# Altium PCB Module_CYW20737A1KML2G.PcbDoc
Units mm, origin at the board's own origin, x right, y up, seen from the top; angles counter-clockwise.
Board outline 43 x 19 mm, 2 copper layers (Top Layer, Bottom Layer); 43 components, 28 nets, 137 pads, 114 vias.
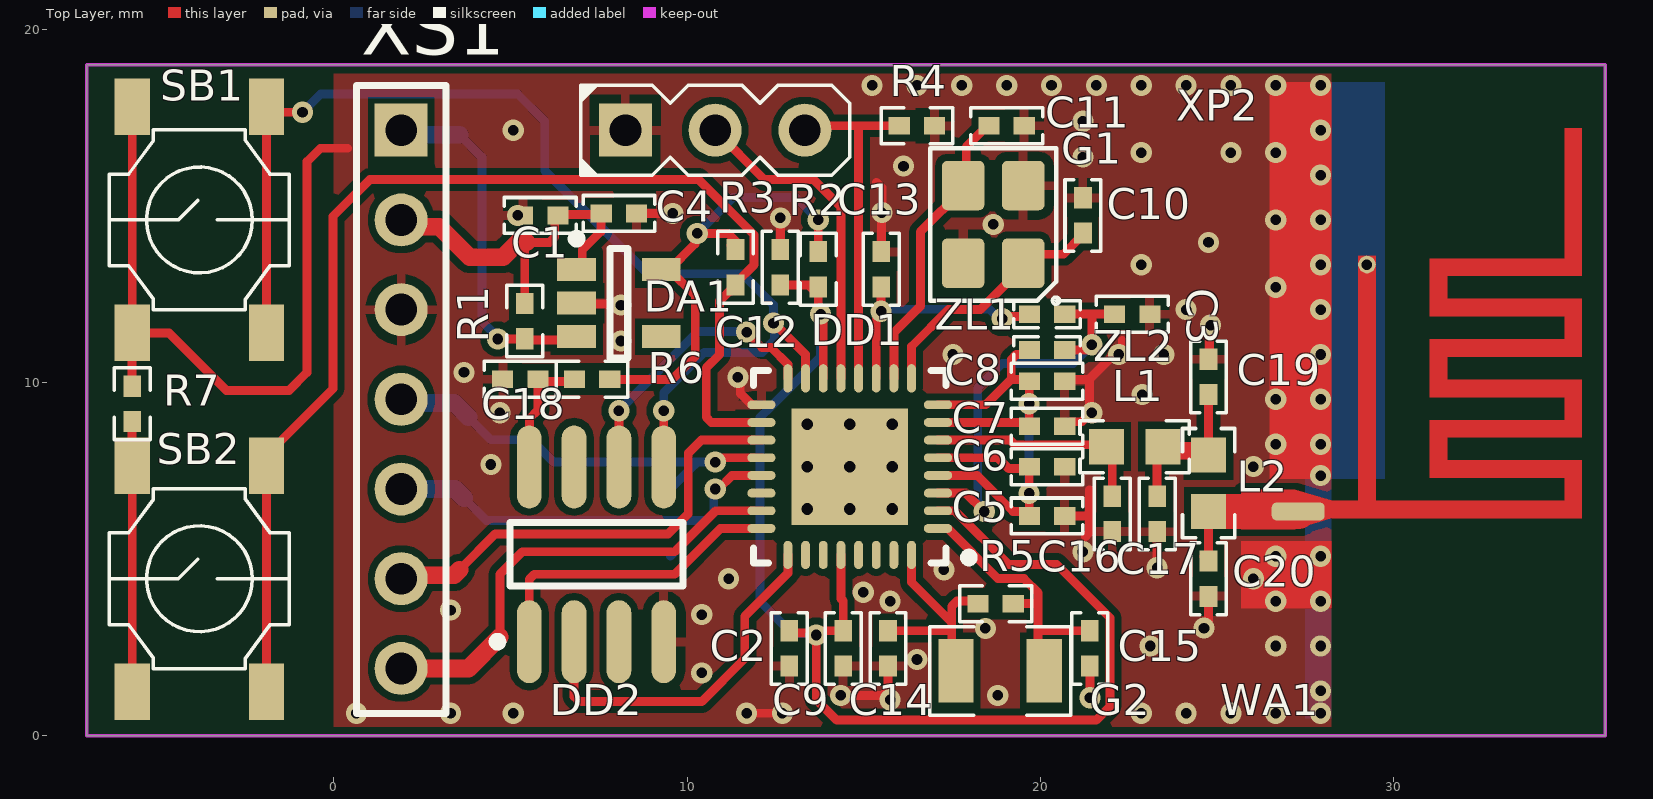
[diagram p0: Top Layer view]
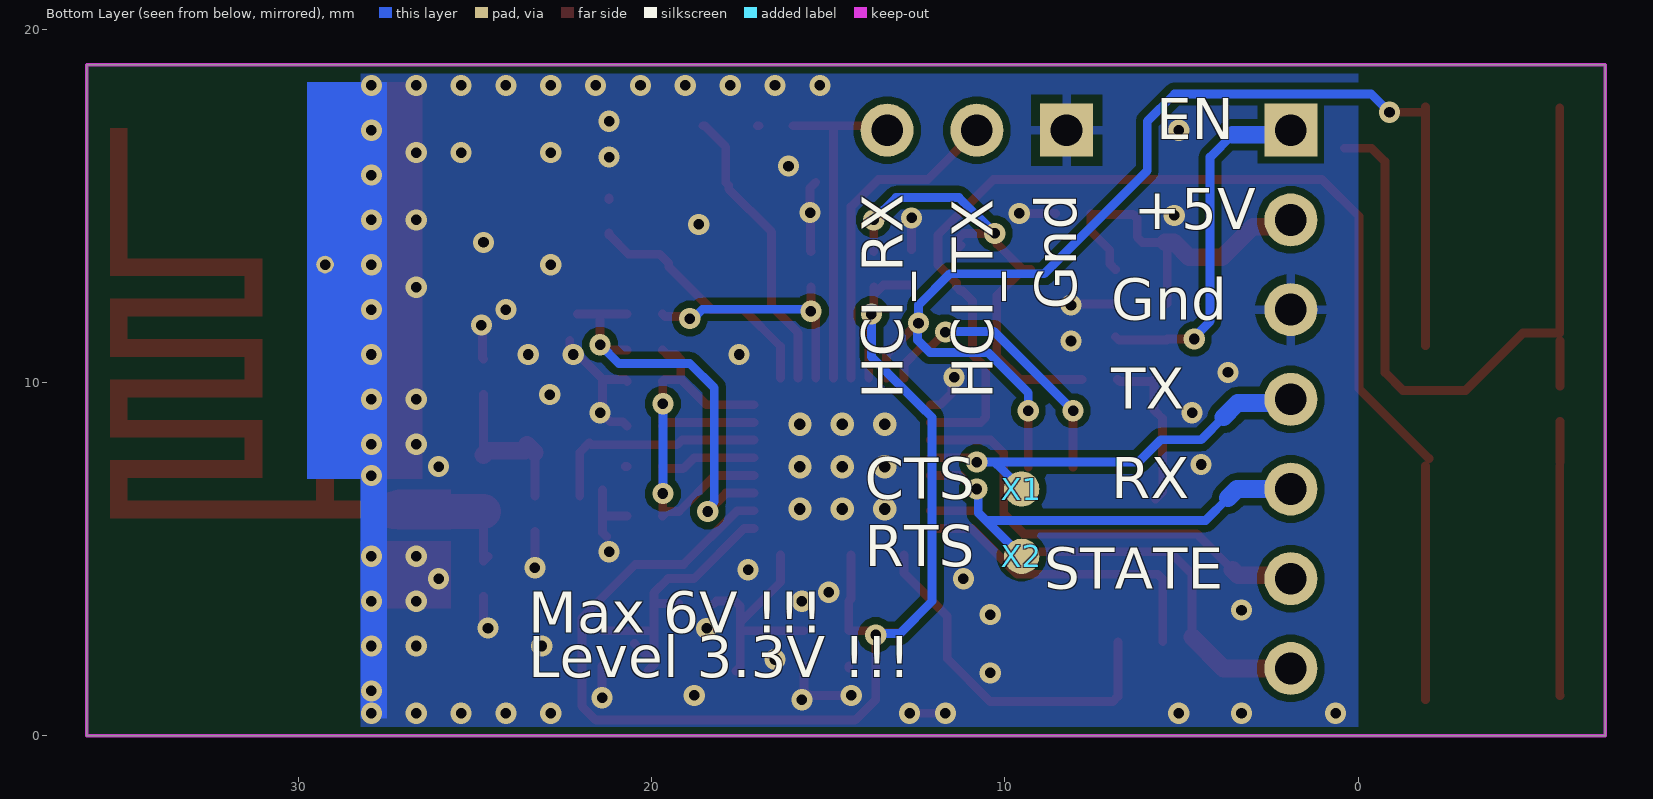
[diagram p1: Bottom Layer view, seen from below]

## Layer stack, top to bottom
Top Solder: solder mask 0.0102, Solder Resist, Dk 3.5
Top Layer: signal copper 0.0356
Dielectric 1: dielectric 0.32, FR-4, Dk 4.8
Bottom Layer: signal copper 0.0356
Bottom Solder: solder mask 0.0102, Solder Resist, Dk 3.5

## Board outline
-7,0 -7,19 36,19 36,0

## Design rules (kind name [scope] priority, off if disabled: settings)
Clearance InPolygon [All vs InPolygon] p1: gap=0.2 ignorepadtopadclearanceinfootprint=FALSE except(0: Arc-Hole Track-Hole SMDPad-Hole THPad-Hole Via-Hole Fill-Hole Poly-Hole Region-Hole Text-Hole)
Clearance [All] p2: gap=0.15 ignorepadtopadclearanceinfootprint=FALSE except(0: Arc-Hole Track-Hole SMDPad-Hole THPad-Hole Via-Hole Fill-Hole Poly-Hole Region-Hole Text-Hole)
PolygonConnect [All] p1: thpad.connectstyle=Relief thpad.reliefconductorwidth=0.254 thpad.reliefentries=4 thpad.polygonreliefangle="90 Angle" thpad.airgapwidth=0.254 smdpad.connectstyle=Relief smdpad.reliefconductorwidth=0.254 smdpad.reliefentries=4 smdpad.polygonreliefangle="90 Angle" smdpad.airgapwidth=0.254 via.connectstyle=Direct via.reliefconductorwidth=0.254 via.reliefentries=4 via.polygonreliefangle="90 Angle" via.airgapwidth=0.254
RoutingVias [All] p1: holewidth=0.5 width=0.9 viastyle="Through Hole" minholewidth=0.3 minwidth=0.6 maxholewidth=0.8 maxwidth=1.3
SolderMaskExpansion SolderMaskExpansion_IsVia [ISVia] p1: expansion=0.102 istentingtop=TRUE
SolderMaskExpansion [All] p2: expansion=0.102 istentingtop=FALSE
Width [All] p1: maxlimit=1 minlimit=0.25 preferedwidth=0.5
30 further rules are at their usual default settings.

## Components (designator, comment, footprint, x,y, rotation, side; value= is the part's Value field where it differs from the comment)
C1 "2.2u 10V" CapKemet1005(0402) 5.842,14.732 r0 top
C2 "2.2u 10V" CapKemet1005(0402) 12.896,2.47 r90 top
C3 "2.2u 10V" CapKemet1005(0402) 22.606,11.938 r180 top
C4 "100n 25V" CapKemet1005(0402) 8.07,14.789 r180 top
C5 "2.2u 10V" CapKemet1005(0402) 20.193,6.223 r180 top
C6 "10p 50V" CapKemet1005(0402) 20.193,7.62 r180 top
C7 "100n 25V" CapKemet1005(0402) 20.193,8.763 r180 top
C8 "10n 50V" CapKemet1005(0402) 20.193,10.033 r180 top
C9 "100n 25V" CapKemet1005(0402) 14.42,2.47 r90 top
C10 "20pF ±5% 50V" CapKemet1005(0402) 21.209,14.732 r270 top
C11 "20pF ±5% 50V" CapKemet1005(0402) 19.05,17.272 r180 top
C12 "100n 25V" CapKemet1005(0402) 12.642,13.265 r270 top
C13 "100n 25V" CapKemet1005(0402) 15.494,13.208 r270 top
C14 "10p" CapKemet1005(0402) 15.69,2.47 r90 top
C15 "10p" CapKemet1005(0402) 21.405,2.47 r90 top
C16 "DNP  NoBom" CapKemet1005(0402) 22.04,6.28 r90 top
C17 "DNP  NoBom" CapKemet1005(0402) 23.31,6.28 r90 top
C18 "100n 25V" CapKemet1005(0402) 5.276,10.09 r0 top
C19 "1.5p 50V" CapKemet1005(0402) 24.765,10.16 r270 top
C20 "DNP  NoBom" CapKemet1005(0402) 24.765,4.445 r90 top
DA1 "MIC5317-3.3YM5-TR" SOT-23-OT5_N 8.07,12.249 r0 top
DD1 "CYW20737A1KML2G" QFN5X5-32_N 14.605,7.62 r180 top
DD2 "MX25R4035FM1IL0 4Mb SPI" MCHP-SOIC-SN8_M 7.435,5.137 r90 top
G1 "24.0000MHZ 10ppM" TSX-3225 18.669,14.478 r90 top
G2 "32.768kHz ±20ppm" VMK3-9005 18.865,1.835 r180 top
L1 "0 ohm NoBom" INDC1608(0603)N 22.675,8.185 r0 top
L2 "0 ohm NoBom" INDC1608(0603)N 24.765,7.15 r270 top
R1 "10k" "REZKemet 0402" 5.403,11.741 r90 top
R2 "0" "REZKemet 0402" 13.716,13.208 r90 top
R3 "10k" "REZKemet 0402" 11.372,13.265 r90 top
R4 "10k" "REZKemet 0402" 16.51,17.272 r180 top
R5 "10M 5%" "REZKemet 0402" 18.738,3.74 r180 top
R6 "0" "REZKemet 0402" 7.308,10.09 r180 top
R7 "10k" "REZKemet 0402" -5.715,9.398 r90 top
SB1 "PTS525SM15SMTR2 LFS" "TACT_SWITCH KPT1187B" -3.81,14.605 r90 top
SB2 "PTS525SM15SMTR2 LFS" "TACT_SWITCH KPT1187B" -3.81,4.445 r90 top
WA1 "INVERTED-F ANTENNA-MIFA  2,4Ghz" "INVERTED-F ANTENNA-MIFA" 28.235,6.407 r90 top net-tie
X1 "PLLS1.27-1-TOP-R" PLLS1.27-1-TOP-R 9.525,6.985 r270 bottom
X2 "PLLS1.27-1-TOP-R" PLLS1.27-1-TOP-R 9.525,5.08 r180 bottom
XP2 "PLS-3" PLS-3-3D 8.255,17.145 r0 top
XS1 "PBS-7" PBS-7-3D 1.905,17.145 r270 top
ZL1 "600Ohms@100MHz" Ferrite1005(0402) 20.193,11.938 r180 top
ZL2 "600Ohms@100MHz" Ferrite1005(0402) 20.193,10.922 r180 top

## Footprints (in the part's own frame and the unit in brackets; to place one, negate y for a bottom-side part, rotate by r counter-clockwise, add the part's x,y. Pads: shape width x height; smd on the part's side, far side on the other; paste and mask are expansions set on the pad)
CapKemet1005(0402) [mm] "Chip Capacitor, Body 1.0x0.5mm, IPC High Density"
  rect 0.6x0.5 smd: 1(-0.5,0) 2(0.5,0)
  silkscreen extent -1.02,-0.51 1.02,0.51, body extent -0.5,-0.3 0.5,0.3, height 0.2
Ferrite1005(0402) [mm]
  rect 0.6x0.5 smd: 1(-0.5,0) 2(0.5,0)
  silkscreen extent -0.94,-0.38 0.94,0.38, body extent -0.5,-0.25 0.5,0.25, height 0.5
INDC1608(0603)N [mm] "Chip Inductor, Body 1.6x0.8mm, IPC Medium Density"
  rect 1x1 smd: 1(-0.8,0) 2(0.8,0)
  silkscreen extent -1.55,-0.74 1.55,0.74, body extent -0.8,-0.4 0.8,0.4, height 0.45
"INVERTED-F ANTENNA-MIFA" [mm]
  rrect50% 0.5x1.5 smd mask+0.102: 1(-0.057,0.93)
  round 0.5 hole 0.3 mask+0.102: 2(6.934,-1.016)
  Top Layer region: 6.604,-6.604 6.604,-7.112 10.795,-7.112 10.795,-6.604
  Top Layer region: -0.254,-7.112 0.254,-7.112 0.254,0.203 -0.254,0.203
  Top Layer region: 1.397,-7.112 1.397,-6.604 -0.254,-6.604 -0.254,-7.112
  Top Layer region: 1.397,-2.794 0.889,-2.794 0.889,-7.112 1.397,-7.112
  Top Layer region: 0.889,-2.794 0.889,-3.302 2.54,-3.302 2.54,-2.794
  Top Layer region: 2.54,-2.794 2.032,-2.794 2.032,-7.112 2.54,-7.112
  Top Layer region: 3.683,-7.112 3.683,-6.604 2.032,-6.604 2.032,-7.112
  Top Layer region: 3.683,-2.794 3.175,-2.794 3.175,-7.112 3.683,-7.112
  Top Layer region: 3.175,-2.794 3.175,-3.302 4.826,-3.302 4.826,-2.794
  Top Layer region: 4.826,-2.794 4.318,-2.794 4.318,-7.112 4.826,-7.112
  Top Layer region: 5.969,-7.112 5.969,-6.604 4.318,-6.604 4.318,-7.112
  Top Layer region: 5.969,-2.794 5.461,-2.794 5.461,-7.112 5.969,-7.112
  Top Layer region: 5.461,-2.794 5.461,-3.302 7.112,-3.302 7.112,-2.794
  Top Layer region: 7.112,-2.794 6.604,-2.794 6.604,-7.112 7.112,-7.112
  Top Layer region: -0.254,-0.762 -0.254,-1.27 7.188,-1.27 7.188,-0.762
  Top Layer region: 0.864,1.735 0.864,0 12.093,0 12.093,1.735
  Top Layer pour cut-out: -2.794,0 12.093,0 12.093,-1.524 -2.794,-1.524
  Top Layer region: -2.794,2.54 -2.794,0 -0.899,0 -0.899,2.54
  Top Layer region: 0.254,0 0.559,1.016 0.559,2.54 0,2.54 0,0
  Top Layer region: -0.254,0 -0.559,1.016 -0.559,2.54 0,2.54 0,0
  Bottom Layer pour cut-out: -2.794,0 12.093,0 12.093,-1.524 -2.794,-1.524
  Bottom Layer region: 12.093,0.735 -5.907,0.735 -5.907,0 0.864,0 0.864,-1.524 12.093,-1.524
MCHP-SOIC-SN8_M [mm] "SOIC, 8-Leads, Body 4.9x3.9mm, Pitch 1.27mm, IPC Low Density"
  oval 2.35x0.7 smd: 1(-2.475,1.905) 2(-2.475,0.635) 3(-2.475,-0.635) 4(-2.475,-1.905) 5(2.475,-1.905) 6(2.475,-0.635) 7(2.475,0.635) 8(2.475,1.905)
  silkscreen extent -2.6,-2.45 0.9,2.93, body extent -3,-2.45 3,2.45, height 1.7
PBS-7-3D [mm] "Connector; Header; 7 Position"
  rect 1.5x1.5 hole 0.9: 1(0,0)
  round 1.5 hole 0.9: 2(2.54,0) 3(5.08,0) 4(7.62,0) 5(10.16,0) 6(12.7,0) 7(15.24,0)
  silkscreen extent -1.27,-1.27 16.51,1.27, body extent -1.27,-1.27 16.51,1.27, height 8.5
PLLS1.27-1-TOP-R [mm]
  round 1 smd paste-0.1: 1(0,0)
PLS-3-3D [mm] "Connector; Header; 3 Position"
  rect 1.5x1.5 hole 0.9: 1(0,0)
  round 1.5 hole 0.9: 2(2.54,0) 3(5.08,0)
  silkscreen extent -1.27,-1.27 6.35,1.27, body extent -1.27,-1.27 6.35,1.27, height 8.44
QFN5X5-32_N [mm] "QFN, 32-Leads, Body 5x5mm, Pitch 0.5mm, IPC Medium Density"
  oval 0.8x0.25 smd: 1(-2.5,1.75) 2(-2.5,1.25) 3(-2.5,0.75) 4(-2.5,0.25) 5(-2.5,-0.25) 6(-2.5,-0.75) 7(-2.5,-1.25) 8(-2.5,-1.75) 17(2.5,-1.75) 18(2.5,-1.25) 19(2.5,-0.75) 20(2.5,-0.25) 21(2.5,0.25) 22(2.5,0.75) 23(2.5,1.25) 24(2.5,1.75)
  oval 0.25x0.8 smd: 9(-1.75,-2.5) 10(-1.25,-2.5) 11(-0.75,-2.5) 12(-0.25,-2.5) 13(0.25,-2.5) 14(0.75,-2.5) 15(1.25,-2.5) 16(1.75,-2.5) 25(1.75,2.5) 26(1.25,2.5) 27(0.75,2.5) 28(0.25,2.5) 29(-0.25,2.5) 30(-0.75,2.5) 31(-1.25,2.5) 32(-1.75,2.5)
  rect 3.3x3.3 smd: 33(0,0)
  silkscreen extent -3.5,-2.73 2.73,2.73, body extent -2.58,-2.58 2.58,2.58, height 0.8
"REZKemet 0402" [mm] "Chip Capacitor, Body 1.0x0.5mm, IPC High Density"
  rect 0.6x0.5 smd: 1(-0.5,0) 2(0.5,0)
  silkscreen extent -1.02,-0.51 1.02,0.51, body extent -0.5,-0.3 0.5,0.3, height 0.2
SOT-23-OT5_N [mm] "SOT23, 5-Leads, Body 2.9x1.6mm, Pitch 0.95mm, Lead Span 2.7mm, IPC Medium Density"
  rect 1.1x0.65 smd: 1(-1.2,0.95) 2(-1.2,0) 3(-1.2,-0.95) 4(1.2,-0.95) 5(1.2,0.95)
  silkscreen extent -1.32,-1.55 0.25,1.95, body extent -1.4,-1.45 1.4,1.45, height 0.95
"TACT_SWITCH KPT1187B" [mm] "SMD_Button 5.2x5.2x1.6"
  rect 1.6x1 smd: 1(-3.2,1.9) 1(3.2,1.9) 2(-3.2,-1.9) 2(3.2,-1.9)
  silkscreen extent -2.55,-2.55 2.55,2.55, body extent -3.2,-2.6 3.2,2.6, height 1.5
TSX-3225 [mm]
  round 0.508 on Mech15: 0(0,0)
  rrect25% 1.4x1.2 smd: 1(-1.1,-0.85) 2(1.1,-0.85) 3(1.1,0.85) 4(-1.1,0.85)
  silkscreen extent -2.26,-1.88 2.16,1.78, body extent -1.65,-1.3 1.65,1.3, height 0.8
VMK3-9005 [mm]
  rect 1x1.8 smd: 1(-1.25,0) 2(1.25,0)
  silkscreen extent -2,-1.25 2,1.25, body extent -1.6,-0.75 1.6,0.75, height 0.8

## Part data
C1 C2 C3 C5: library part LMK105BJ225MV-F, "CAP CER 2.2uF 10V X5R 0402", Digi-Key Part Number=587-3153-1-ND, Package=0402, HelpURL=https://www.digikey.com/en/products/detail/taiyo-yuden/LMK105BJ225MV-F/2774764, Manufacturer Part Number=LMK105BJ225MV-F, Part Number=LMK105BJ225MV-F, Price$=0.01452
C4 C7 C9 C12 C13 C18: library part CL05B104KA5NNNC, "CAP CER 0.1UF 25V X7R 0402", Digi-Key Part Number=1276-6720-1-ND, Package=0402, HelpURL=https://www.digikey.com/en/products/detail/samsung-electro-mechanics/CL05B104KA5NNNC/5961204, Manufacturer Part Number=CL05B104KA5NNNC, Part Number=CL05B104KA5NNNC, Price$=0.00487
C6: library part CL05C100DB5NNNC, "CAP CER 10PF 50V C0G/NP0 0402", Digi-Key Part Number=1276-1625-1-ND, Package=0402, HelpURL=https://www.digikey.com/en/products/detail/samsung-electro-mechanics/CL05C100DB5NNNC/3887283, Manufacturer Part Number=CL05C100DB5NNNC, Part Number=CL05C100DB5NNNC, Price$=0.00647
C8: library part CL05B103KB5NNNC, "CAP CER 10000PF 50V X7R 0402", Digi-Key Part Number=1276-1028-1-ND, Package=0402, HelpURL=https://www.digikey.com/en/products/detail/samsung-electro-mechanics/CL05B103KB5NNNC/3886686, Manufacturer Part Number=CL05B103KB5NNNC, Part Number=CL05B103KB5NNNC, Price$=0.00399
C10 C11: library part CC0402JRNPO9BN200, "20pF ±5% 50V Ceramic Capacitor C0G, NP0 0402 (1005 Metric)", Digi-Key Part Number=311-1417-1-ND, HelpURL=https://www.digikey.com/en/products/detail/yageo/CC0402JRNPO9BN200/2833582, Manufacturer Part Number=CC0402JRNPO9BN200, Part Number=CC0402JRNPO9BN200, Price$=0,1
C14 C15: library part CC0402DRNPO9BN100, "10pF 0402 50V C0G  +/-0.5pF", Mouser Part Number=603-CC402DRNPO9BN100, Package=0402, HelpURL=https://www.digikey.com/en/products/detail/yageo/CC0402DRNPO9BN100/2297890?s=N4IgTCBcDaIMJwAwBZFgCICUByAFA8gJwBC2AjIoiALoC%2BQA, Manufacturer Part Number=CC0402DRNPO9BN100, Part Number=CC0402DRNPO9BN100, Price$=0.1
C16 C17 C20: library part GCM1555C1H151JA16D, "150pF 0402 50V NP0  +/-5%", Mouser Part Number=81-GCM1555C1H151J16D, Package=0402, HelpURL=https://eu.mouser.com/ProductDetail/Murata-Electronics/GCM1555C1H151JA16D?qs=%2Fha2pyFadugcbh64YeyVIuIl%252BPkOajCwN%252Ba25dmljYEPyTqNgKhHVA%3D%3D, Manufacturer Part Number=GCM1555C1H151JA16D, Part Number=GCM1555C1H151JA16D, Price$=0.1
C19: library part CL05C1R5BB5NNNC, "CAP CER 1.5pF 50V COG 0402 ±0.1pF", Digi-Key Part Number=1276-1656-1-ND, Package=0402, HelpURL=https://www.digikey.com/en/products/detail/samsung-electro-mechanics/CL05C1R5BB5NNNC/3887314, Manufacturer Part Number=CL05C1R5BB5NNNC, Part Number=CL05C1R5BB5NNNC, Price$=0.00874
DA1: "Linear Voltage Regulator IC 1 Output 150mA SOT-23-5", Digi-Key Part Number=MIC5317-3.3YM5-CT-ND, HelpURL=https://www.digikey.com/product-detail/en/microchip-technology/MIC5317-3.3YM5-TR/MIC5317-3.3YM5-CT-ND/7671939, Manufacturer Part Number=MIC5317-3.3YM5-TR, Part Number=MIC5317-3.3YM5-TR, Price$=0,16
DD1: "IC RF TXRX+MCU BLUETOOTH 32VFQFN", Digi-Key Part Number=2015-CYW20737A1KML2G-ND, HelpURL=https://www.digikey.com/en/products/detail/cypress-semiconductor-corp/CYW20737A1KML2G/6592884, Manufacturer Part Number=CYW20737A1KML2G, Part Number=CYW20737A1KML2G, Price$=0,86
DD2: library part MX25R4035FM1IL0, "IC FLASH 4M SPI 33MHZ 8SOP", Package=8-SOP, Digi-Key Part Number=MX25R4035FM1IL0, HelpURL=https://www.digikey.com/en/products/detail/macronix/MX25R4035FM1IL0/6558612, Manufacturer Part Number=MX25R4035FM1IL0, Note="SOP 8L(150mil)", Part Number=MX25R4035FM1IL0
G1: library part "TSX-3225 24.0000MF15X-AC6", "24MHz ±10ppm Crystal 9pF 40 Ohms 4-SMD, No Lead", Digi-Key Part Number=SER4180CT-ND, HelpURL=https://www.digikey.com/en/products/detail/epson/TSX-3225-24-0000MF15X-AC6/5261221, Manufacturer Part Number="TSX-3225 24.0000MF15X-AC6", Part Number="TSX-3225 24.0000MF15X-AC6", Price$=0.33
G2: library part VMK3-9005-32K7680000, "32.768kHz ±20ppm Crystal   2-SMD, No Lead", Digi-Key Part Number=150-VMK3-9005-32K7680000CT-ND, HelpURL=https://www.digikey.com/en/products/detail/microchip-technology/VMK3-9005-32K7680000/13175117, Manufacturer Part Number=VMK3-9005-32K7680000, Part Number=VMK3-9005-32K7680000, Price$=0.34
L1 L2: library part AISC-0603-R27G-T, "Fixed Inductors 270nH 2% -40C +125C", Mouser Part Number=815-AISC0603R27GT, HelpURL=https://eu.mouser.com/ProductDetail/ABRACON/AISC-0603-R27G-T?qs=%2Fha2pyFaduhMG%2FX31G0KOK4wVUuURxruJbjcpPhZfbyFA8e1ZTy%2F3Q%3D%3D, Manufacturer Part Number=AISC-0603-R27G-T, Part Number=AISC-0603-R27G-T
R1 R3 R4 R7: library part RESC1005(0402), "RES SMD 5.1K OHM 1% 1/10W 0402", Manufacturer Part Number=ERJ-2RKF5101X, Mouser Part Number=755-SFR01MZPF5101, Package=0402, HelpURL=https://eu.mouser.com/ProductDetail/ROHM-Semiconductor/SFR01MZPF5101?qs=sGAEpiMZZMvdGkrng054t7z4BkURc4Lz8VVRSaz2ejIiXEQeYNXBXw%3D%3D, Part Number=RESC1005(0402), Price$=0.1
R2 R6: library part RMCF0402ZT0R00, "RES SMD 0402 0 Ohm", Mouser Part Number=RMCF0402ZT0R00CT-ND, Package=0402, HelpURL=https://www.digikey.com/en/products/detail/stackpole-electronics-inc/RMCF0402ZT0R00/1756905, Manufacturer Part Number=RMCF0402ZT0R00, Part Number=RMCF0402ZT0R00, Price$=0.00186
R5: library part RMCF0402JT10M0, "RES SMD 0402 10 MOhm 5% 200ppm", Digi-Key Part Number=RMCF0402JT10M0CT-ND, Package=0402, HelpURL=https://www.digikey.com/en/products/detail/stackpole-electronics-inc/RMCF0402JT10M0/1758210, Manufacturer Part Number=RMCF0402JT10M0, Part Number=RMCF0402JT10M0, Price$=0.00186
SB1 SB2: "SWITCH TACTILE SPST-NO 0.02A 15V", Digi-Key Part Number=CKN9104CT-ND, HelpURL=https://www.digikey.com/products/en?keywords=CKN9104CT-ND, Manufacturer Part Number="PTS525SM15SMTR2 LFS", Part Number="PTS525SM15SMTR2 LFS", Price$=0.33
XP2: "CONN HEADER VERT 3POS 2.54MM", Digi-Key Part Number=1849-1003-ND, Manufacturer Part Number=PR20203VBNN, Package="Header 3POS 2.54mm", HelpURL=https://www.digikey.com/product-detail/en/metz-connect-usa-inc/PR20203VBNN/1849-1003-ND/7794768, Part Number=PLS-3
ZL1 ZL2: library part MMZ1005S601CT000, "FERRITE BEAD 600 OHM 0402 1LN", Digi-Key Part Number=445-2162-1-ND, Package=0402, HelpURL=https://www.digikey.com/en/products/detail/tdk-corporation/MMZ1005S601CT000/765046, Manufacturer Part Number=MMZ1005S601CT000, Part Number=MMZ1005S601CT000, Price$=0.02280
WA1: HelpURL=https://www.cypress.com/file/136236/download, Part Number="INVERTED-F ANTENNA-MIFA  2,4Ghz"
X1 X2: Part Number=PLLS1.27-1-TOP-R
XS1: Part Number=PBS-7

## Via types
v1: diameter 0.6, hole 0.3, Top Layer to Bottom Layer, tented both sides, 105 vias
v2: diameter 0.66, hole 0.33, Top Layer to Bottom Layer, tented both sides, 9 vias

## Nets (pads, with @x,y where several pads share a name; then routed paths per layer and width w, separated by ;. In a path a pad name is that pad's centre, name@x,y a point inside that pad or via, vN(x,y) a via of type N, cw(c..) or ccw(c..) an arc to the next point about the centre after c; other vN are vias at no path point)
+3.3V: DA1.5 R2.2 R3.2 R6.1 | length 13.5
  Top Layer w0.25: R6.1 9.582,10.09 10.229,10.737 10.229,12.465 DA1.5@9.495,13.199 ; DA1.5 DA1.5@9.495,13.199 ; R3.2@11.247,13.89 R3.2 ; R3.2@11.43,13.953 11.159,14.224 v1(10.287,14.224) 10.22,14.157 10.22,13.924 DA1.5@9.495,13.199 ; R2.2 v1(13.716,14.605)
  Bottom Layer w0.25: v1(10.287,14.224) 11.3,15.237 13.084,15.237 v1(13.716,14.605)
+5V: C1.2 C4.2 DA1.1 R1.2 XS1.2 | length 10.8
  Top Layer w0.25: R1.2 5.403,13.97 ; 5.461,13.97 6.106,13.97 6.252,14.116 6.252,14.642 6.37,14.76 7.541,14.76 C4.2 7.562,14.781 7.562,14.281 7.034,13.753 7.034,13.363 DA1.1
  Top Layer w0.5: XS1.2@1.651,14.605 1.842,14.414 2.985,14.414 3.847,13.552 4.789,13.552 5.207,13.97 5.403,13.97 5.461,13.97
Blue_PUART_RX: DD1.19 XS1.6 | length 12.8
  Top Layer w0.25: 3.556,4.699 4.572,5.715 9.467,5.715 10.033,6.281 10.033,8.001 10.402,8.37 DD1.19
  Top Layer w0.5: XS1.6 2.008,4.548 3.405,4.548 3.556,4.699
Blue_PUART_TX: DD1.23 XS1.7 | length 13.1
  Top Layer w0.25: 4.699,2.794 4.699,4.572 5.334,5.207 9.652,5.207 10.815,6.37 DD1.23
  Top Layer w0.5: XS1.7 3.81,1.905 4.699,2.794
BlueHCI_nReset: DD1.18 R3.1 SB2.2 | length 34.7
  Top Layer w0.25: SB2.2@-2.008,7.847 -0.027,9.828 -0.027,14.705 1.016,15.748 10.328,15.748 11.897,14.179 11.897,13.34 11.372,12.815 11.372,12.715 11.247,12.59 11.197,12.59 10.922,12.315 10.922,10.795 10.541,10.414 10.541,9.016 10.687,8.87 DD1.18 ; SB2.2@-1.91,7.645 -1.91,1.245 -1.91,1.021 SB2.2@-1.905,1.016
BlueHCI_Recovery: DD1.15 DD2.5 SB1.2 | length 33.3
  Top Layer w0.25: SB1.2@-1.91,17.805 -1.91,11.405 -1.91,11.054 SB1.2@-1.905,11.049 ; SB1.2@-1.778,17.653 v1(-0.889,17.653) ; DD2.5 v1(9.34,9.201) ; v1(12.446,11.684) 12.463,11.684 13.355,10.792 DD1.15
  Bottom Layer w0.25: v1(-0.889,17.653) -0.372,18.17 5.198,18.17 5.969,17.399 5.969,16.002 8.89,13.081 11.557,13.081 12.446,12.192 v1(12.446,11.684) 12.473,11.657 12.473,11.203 12.125,10.855 10.486,10.855 9.34,9.709 v1(9.34,9.201)
BlueHCI_RX: DD1.12 R4.2 XP2.3 | length 9.9
  Top Layer w0.25: XP2.3 13.462,17.272 14.855,17.272 ; DD1.12 14.855,17.272 ; R4.2 14.855,17.272
BlueHCI_TX: DD1.13 XP2.2 | length 9.3
  Top Layer w0.25: XP2.2 12.192,15.748 13.589,15.748 14.355,14.982 DD1.13
GND: C1.1 C2.1 C3.1 C4.1 C5.1 C6.1 C7.1 C8.1 C9.1 C10.1 C11.1 C12.1 C13.1 C14.1 C15.1 C16.1 C17.1 C18.1 C19.1 C20.1 DA1.2 DD1.17 DD1.33 DD2.4 G1.2 G1.4 R4.1 R7.2 SB1.1 WA1.2 XP2.1 XS1.3 | length 40.8
  Top Layer w0.25: R7.2 SB1.1@-5.715,11.176 ; SB1.1@-5.71,17.775 -5.71,11.405 -5.598,11.405 -4.674,11.405 -3.048,9.779 -1.27,9.779 -0.762,10.287 -0.762,16.256 -0.381,16.637 0.381,16.637 ; v1(5.207,14.732) C1.1 ; DA1.2 6.899,12.22 8.1,12.22 v1(8.128,12.192) ; C4.1 v1(9.594,14.789) ; v1(11.439,10.151) 11.506,10.084 11.506,9.694 11.83,9.37 DD1.17 ; v1(11.684,0.635) v1(12.7,0.635) ; C12.1 v1(12.642,14.662) ; v1(14.351,1.143) 15.544,1.143 15.69,1.289 C14.1 ; C9.1@14.42,1.92 C9.1 ; 15.359,15.671 15.515,15.514 v1(15.515,14.814) ; C13.1 15.505,13.719 v1@15.505,14.803 ; R4.1@16.96,17.272 R4.1 ; C5.1 21.396,6.223 ; C6.1 C6.1@20.743,7.62 ; C7.1 20.818,8.888 21.178,8.888 21.434,9.144 v1(21.463,9.144) 21.396,9.211 21.396,9.806 21.391,9.811 21.391,10.09 ; C8.1 20.75,10.09 21.391,10.09 ; v1(21.209,5.207) v1@21.276,5.274 ; C10.1@21.209,15.182 C10.1 ; 21.276,5.637 21.396,5.757 21.396,6.967 ; v1(21.405,1.073) C15.1 ; 22.322,11.192 22.322,11.022 21.391,10.09 ; v1(23.31,4.756) C17.1 ; v1(24.638,3.048) 24.638,3.143 24.765,3.27 C20.1 ; C19.1 24.794,10.689 24.794,11.598 v1(24.823,11.627)
  other v1: 0.635,0.635 3.302,0.635 5.08,0.635 22.86,0.635 24.13,0.635 25.4,0.635 26.67,0.635 27.94,0.635 15.748,1.016 18.796,1.143 27.94,1.27 10.414,1.778 16.51,2.159 23.114,2.54 26.67,2.54 27.94,2.54 18.446,3.04 10.414,3.429 3.302,3.556 15.748,3.81 26.67,3.81 27.94,3.81 14.986,4.064 11.176,4.445 26.035,4.445 17.272,4.699 26.67,5.08 27.94,5.08 27.94,7.366 26.035,7.62 4.445,7.68 26.67,8.255 27.94,8.255 4.699,9.144 26.67,9.525 27.94,9.525 22.891,9.659 3.683,10.287 17.526,10.795 22.225,10.795 23.495,10.795 27.94,10.795 8.128,11.176 24.13,12.065 27.94,12.065 26.67,12.7 22.86,13.335 27.94,13.335 24.765,13.97 18.669,14.478 26.67,14.605 27.94,14.605 27.94,15.875 16.129,16.129 21.209,16.383 22.86,16.51 25.4,16.51 26.67,16.51 5.08,17.145 27.94,17.145 21.209,17.399 15.24,18.415 16.51,18.415 17.78,18.415 19.05,18.415 20.32,18.415 21.59,18.415 22.86,18.415 24.13,18.415 25.4,18.415 26.67,18.415 27.94,18.415
  other v2: 13.405,6.42 14.605,6.42 15.805,6.42 13.405,7.62 14.605,7.62 15.805,7.62 13.405,8.82 14.605,8.82 15.805,8.82
NetC2_2: C2.2 C9.2 C12.2 DD1.2 DD1.14 DD1.28 R2.1 | length 37.7
  Top Layer w0.25: C12.2 13.436,12.765 R2.1@13.716,12.485 ; C2.2 12.955,2.911 13.598,2.911 v1(13.658,2.851) ; R2.1 R2.1@13.716,12.485 ; DD1.14 13.855,11.768 13.847,11.776 13.847,11.815 13.855,11.823 13.716,11.962 R2.1@13.716,12.485 ; DD1.28 14.355,3.882 14.42,3.817 C9.2 13.777,2.97 v1(13.658,2.851) ; DD1.2 17.582,6.37 19.1,4.852 20.462,4.852 21.98,3.334 21.98,0.835 21.586,0.441 14.24,0.441 13.658,1.023 v1(13.658,2.851)
  Bottom Layer w0.25: v1(13.658,2.851) 13.618,2.891 12.983,2.891 12.065,3.809 12.065,9.017 12.379,9.331 13.78,10.732 v1(13.78,11.938)
NetC3_2: C3.2 DD1.3 ZL1.1 ZL2.1 | length 12
  Top Layer w0.25: DD1.3 17.895,6.87 v1(18.415,6.35) ; ZL2.1 21.317,10.922 v1(21.463,11.068) 21.463,11.938 ; ZL1.1 21.463,11.938 ; C3.2 21.463,11.938
  Bottom Layer w0.25: v1(18.415,6.35) 18.415,6.445 18.23,6.63 18.23,9.848 18.923,10.541 20.936,10.541 v1(21.463,11.068)
NetC5_2: C5.2 C6.2 C7.2 C8.2 DD1.4 DD1.5 DD1.7 DD1.8 ZL2.2 | length 17.5
  Top Layer w0.25: DD1.4 18.208,7.37 19.23,6.348 19.567,6.348 C5.2@19.635,6.28 ; DD1.5 18.799,7.87 19.106,7.563 19.622,7.563 19.68,7.62 C6.2 19.689,7.616 19.689,6.862 v1(19.685,6.858) 19.689,6.854 19.689,6.227 C5.2 ; DD1.7 19.586,8.87 C7.2 ; DD1.8 18.459,9.37 19.179,10.09 ; C7.2@19.689,8.888 19.689,9.394 v1(19.685,9.398) 19.689,9.402 19.689,10.029 C8.2 19.636,10.09 19.179,10.09 ; ZL2.2 19.568,10.797 19.326,10.797 19.179,10.651 19.179,10.09
  Bottom Layer w0.25: v1(19.685,6.858) v1(19.685,9.398)
NetC10_2: C10.2 DD1.9 G1.1 | length 7.2
  Top Layer w0.25: DD1.9 16.355,11.021 17.399,12.065 18.306,12.065 19.519,13.278 G1.1 19.773,13.632 20.659,13.632 21.209,14.182 C10.2
NetC11_2: C11.2 DD1.10 G1.3 | length 8.2
  Top Layer w0.25: DD1.10 15.855,11.41 16.607,12.162 16.607,14.266 17.819,15.478 G1.3@17.819,15.492 ; G1.3 17.907,15.666 17.907,16.679 18.5,17.272 C11.2
NetC13_2: C13.2 DD1.11 ZL1.2 | length 7
  Top Layer w0.25: DD1.11 15.355,11.786 15.494,11.925 C13.2 ; v1(18.923,11.811) 18.986,11.874 19.629,11.874 ZL1.2
  Bottom Layer w0.25: v1(15.494,12.02) 15.551,12.077 18.562,12.077 18.828,11.811 v1(18.923,11.811)
NetC14_2: C14.2 DD1.32 G2.2 R5.2 | length 6.9
  Top Layer w0.25: C14.2 17.468,2.97 ; DD1.32 16.355,4.346 17.495,3.206 ; G2.2 17.495,1.955 17.495,2.335 17.495,2.482 17.495,2.97 17.495,3.206 ; R5.2 18.168,3.81 17.641,3.81 17.495,3.664 17.495,3.206
NetC15_2: C15.2 DD1.1 G2.1 R5.1 | length 8.5
  Top Layer w0.25: DD1.1 17.38,5.87 18.798,4.452 19.536,4.452 19.94,4.048 19.94,2.978 ; R5.1 19.881,3.74 ; G2.1 19.94,2.01 19.94,2.978 ; G2.1@20.135,2.335 20.215,2.335 G2.1@20.49,2.61 ; C15.2 19.948,2.97 19.94,2.978
NetC16_2: C16.2 DD1.6 L1.1 | length 6.4
  Top Layer w0.25: DD1.6 19.146,8.37 19.278,8.238 21.708,8.238 21.765,8.295 22.04,8.02 C16.2
NetC17_2: C17.2 C19.2 L1.2 L2.1 | length 4.7
  Top Layer w0.25: C17.2 L1.2@23.31,8.02 ; L2.1 C19.2
  Top Layer w0.5: L1.2@23.31,8.02 23.533,8.243 L1.2@23.533,8.178 ; L1.2 23.593,8.067 24.647,8.067 L2.1
NetC18_2: C18.2 DD2.8 R6.2 | length 4.9
  Top Layer w0.25: DD2.8@5.53,6.909 5.738,6.701 5.74,6.701 5.53,6.911 DD2.8 ; DD2.8@5.538,7.612 5.538,8.982 5.776,9.22 C18.2 ; C18.2@5.84,10.027 6.745,10.027 R6.2
NetC20_2: C20.2 L2.2 WA1.1 | length 4.1
  Top Layer w0.25: C20.2@24.64,5.07 C20.2 L2.2
  Top Layer w1: L2.2 WA1.1
NetDA1_3: DA1.3 R1.1 XS1.1 | length 10.2
  Top Layer w0.25: v1(4.641,11.233) 4.645,11.237 5.399,11.237 R1.1 ; R1.1@5.403,11.207 6.777,11.207 DA1.3
  Bottom Layer w0.25: 3.556,17.018 4.191,16.383 4.191,11.738 4.572,11.357 v1@4.572,11.176
  Bottom Layer w0.5: XS1.1 2.032,17.018 3.556,17.018
NetDD1_16: DD1.16 DD2.6 | length 8.1
  Top Layer w0.25: DD2.6 v1(8.07,9.201) ; v1(11.684,11.43) 12.123,10.991 12.377,10.991 12.855,10.513 DD1.16
  Bottom Layer w0.25: v1(8.07,9.201) 10.318,11.449 11.665,11.449 v1(11.684,11.43)
NetDD1_24: DD1.24 DD2.1 | length 8.9
  Top Layer w0.25: DD2.1 5.53,4.426 5.676,4.572 9.652,4.572 10.95,5.87 DD1.24
NetDD1_25: DD1.25 DD2.2 | length 10.4
  Top Layer w0.25: DD2.2 6.8,1.112 6.946,0.966 10.415,0.966 11.635,2.186 11.635,3.38 12.855,4.6 DD1.25
NetR7_1: R7.1 SB2.1 | length 7.7
  Top Layer w0.25: SB2.1@-5.715,1.143 -5.71,1.148 -5.71,1.245 SB2.1@-5.71,7.645 ; SB2.1@-5.715,7.747 R7.1
SPI_MiSo/PUART_RTS: DD1.20 X1.1 XS1.4 | length 13.7
  Top Layer w0.25: v1(10.795,7.747) 10.89,7.747 11.013,7.87 DD1.20
  Bottom Layer w0.25: XS1.4@1.778,9.525 1.922,9.381 3.446,9.381 ; 3.81,9.017 4.445,8.382 5.588,8.382 6.223,7.747 v1(10.795,7.747) ; X1.1 10.22,7.68
  Bottom Layer w0.5: XS1.4 2.008,9.422 3.405,9.422 3.446,9.381 3.81,9.017
SPI_SCLK/PUART_CTS: DD1.21 X2.1 XS1.5 | length 12.9
  Top Layer w0.25: v1(10.795,6.985) 10.89,6.985 11.275,7.37 DD1.21
  Bottom Layer w0.25: 3.683,6.731 4.318,6.096 10.541,6.096 ; X2.1 10.541,6.096 ; v1(10.795,6.985) 10.755,6.945 10.755,6.31 10.541,6.096
  Bottom Layer w0.5: XS1.5 3.429,6.985 3.683,6.731
pads on no net: DA1.4 DD1.22 DD1.26 DD1.27 DD1.29 DD1.30 DD1.31 DD2.3 DD2.7 G1.0

## Polygon pours and split planes (outlines as drawn)
GND on Bottom Layer "GND_L02_P001" (solid, remove dead copper, pour order 1): 0,19 28.235,19 28.235,0 0,0
GND on Top Layer "GND_L01_P000" (solid, remove dead copper, pour order 0): 0,19 28.235,19 28.235,0 0,0

## Keep-outs
Keep-Out Layer:
  the board outline again, w0.1

## Silkscreen, mask and mechanical layers (free items; w line width, h text height)
Bottom Overlay:
  text "EN" at 5.715,16.502 h2
  text "+5V" at 6.35,13.953 h2
  text "Gnd" at 7.592,12.065 h2 r270
  text "Gnd" at 6.985,11.402 h2
  text "HCI_TX" at 9.965,9.525 h2 r270
  text "HCI_RX" at 12.505,9.525 h2 r270
  text "TX" at 6.985,8.882 h2
  text "RX" at 6.985,6.342 h2
  text "CTS" at 13.97,6.322 h2
  text "RTS" at 13.97,4.417 h2
  text "STATE" at 8.89,3.782 h2
  text "Max 6V !!!" at 23.495,2.531 h2
  text "Level 3.3V !!!" at 23.495,1.273 h2
Top Solder:
  rectangle: 28.5,0 36,19
Bottom Solder:
  rectangle: 30,0 36,19